# Altium PCB SDI-FIBER.PcbDoc (part 1 of 2)
Units mm, origin at the board's own origin, x right, y up, seen from the top; angles counter-clockwise.
Board outline 80.01 x 32 mm, 4 copper layers (Top Layer, Layer 1, Layer 2, Bottom Layer), stack 1.065 mm thick; 109 components, 63 nets, 333 pads, 163 vias.
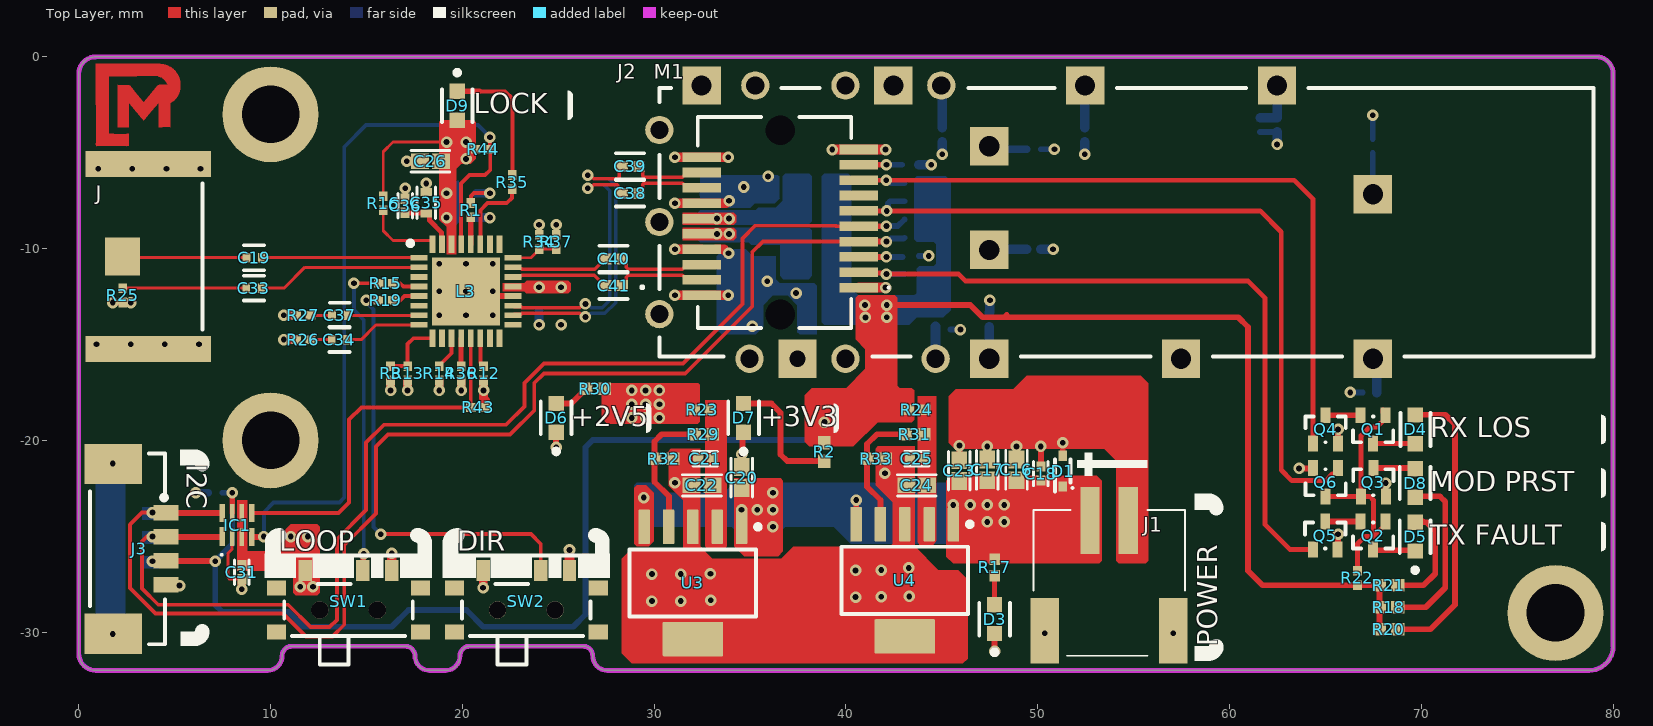
[diagram p0: Top Layer view]
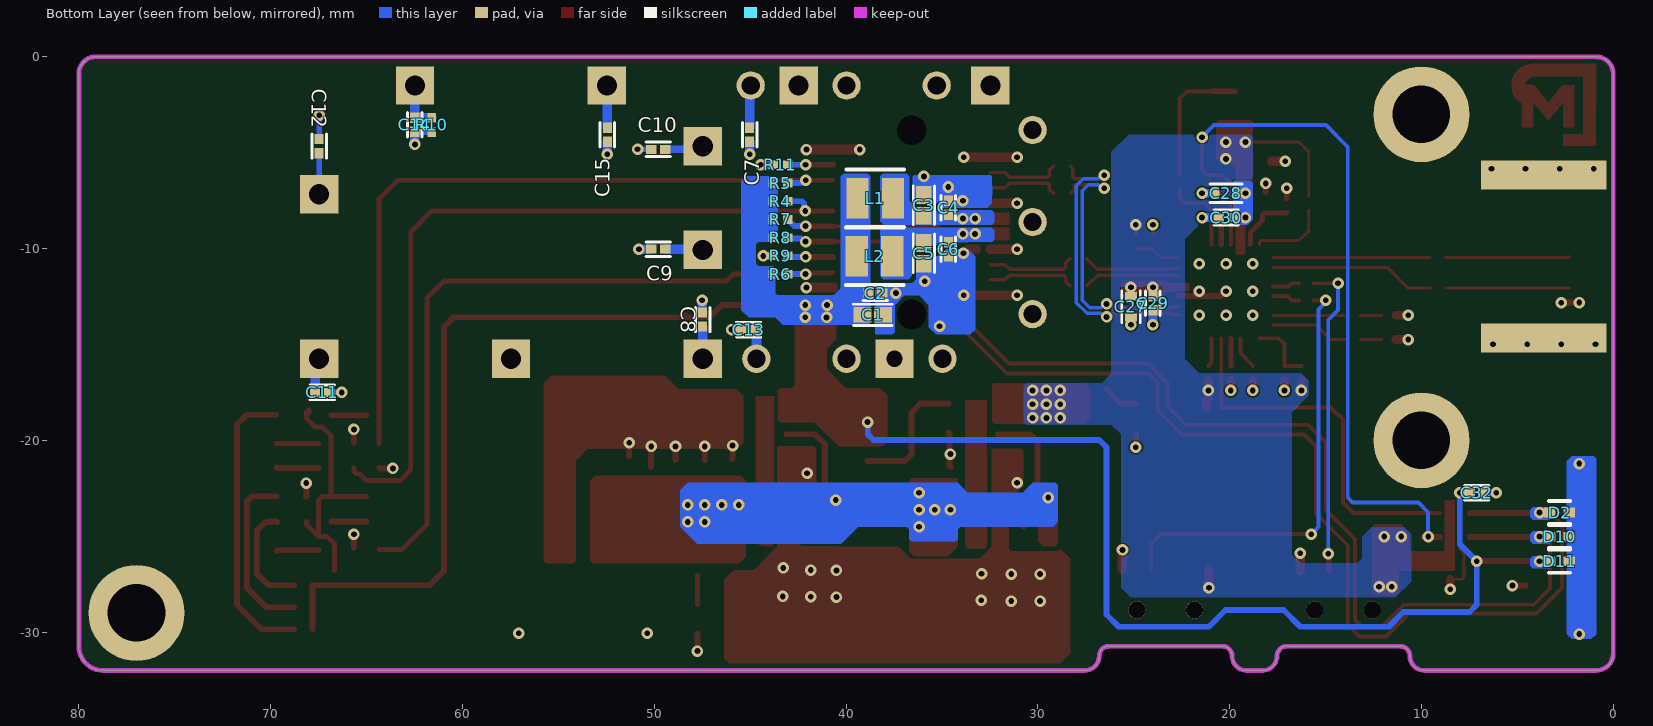
[diagram p1: Bottom Layer view, seen from below]
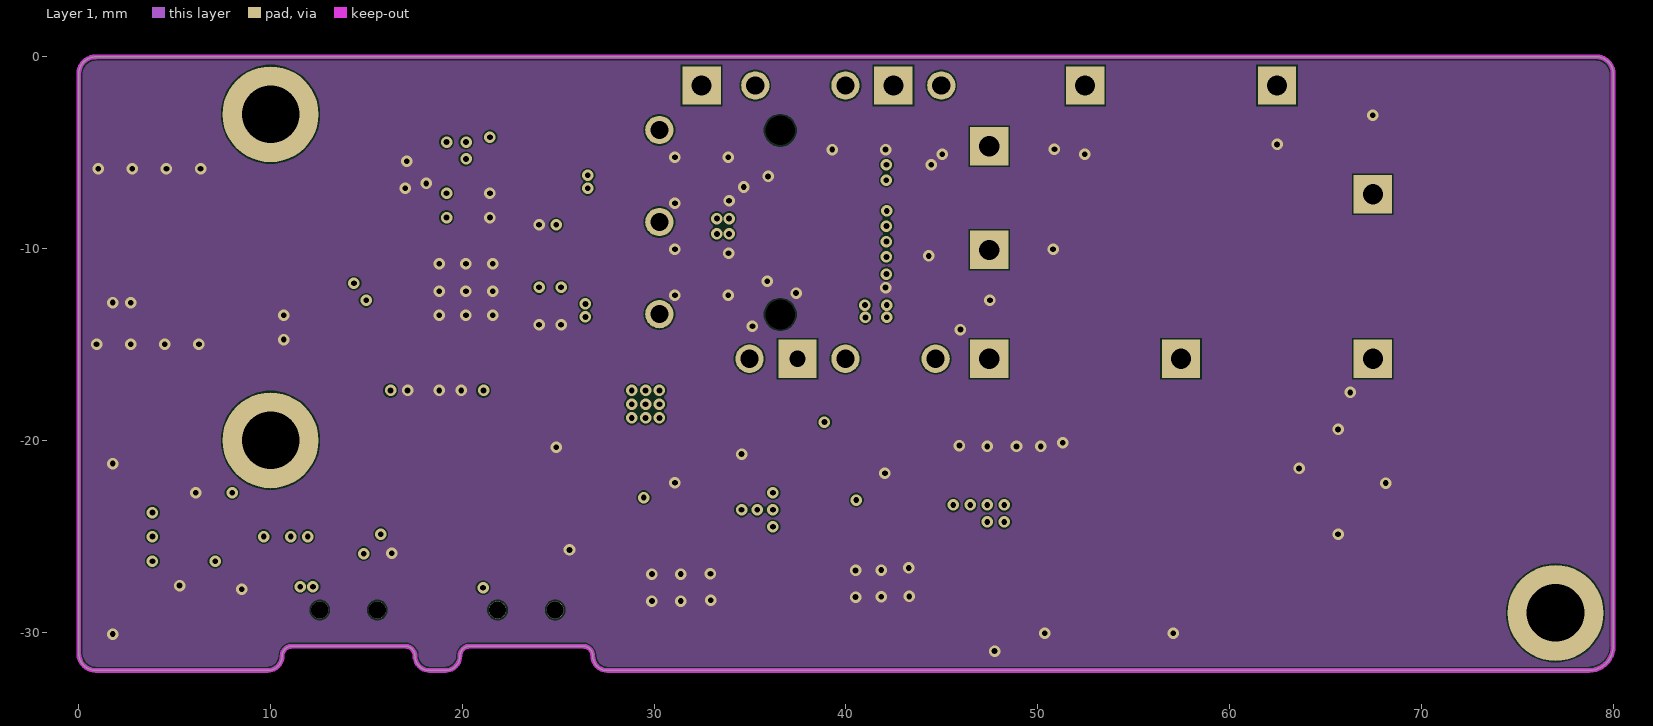
[diagram p2: Layer 1]
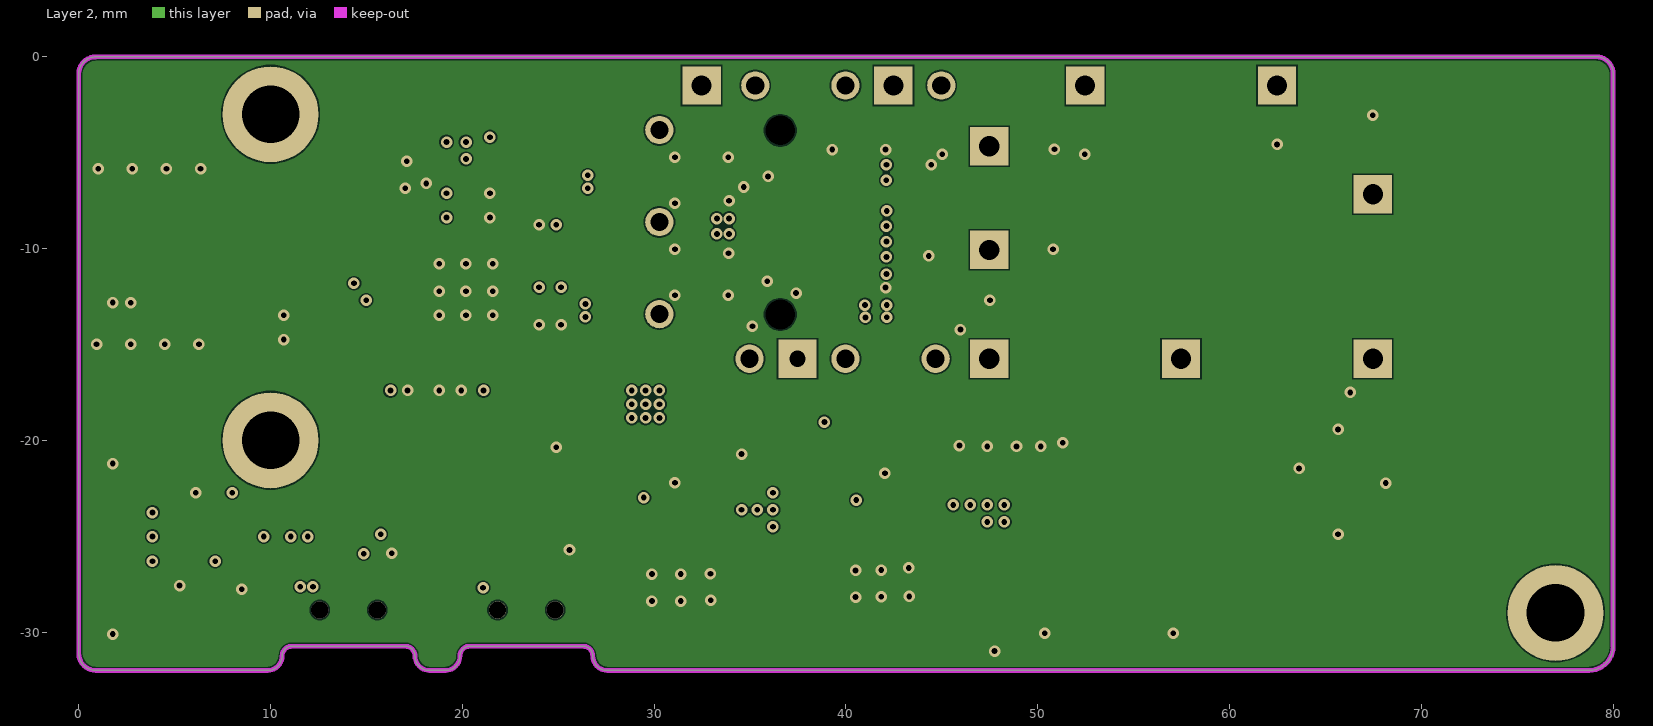
[diagram p3: Layer 2]
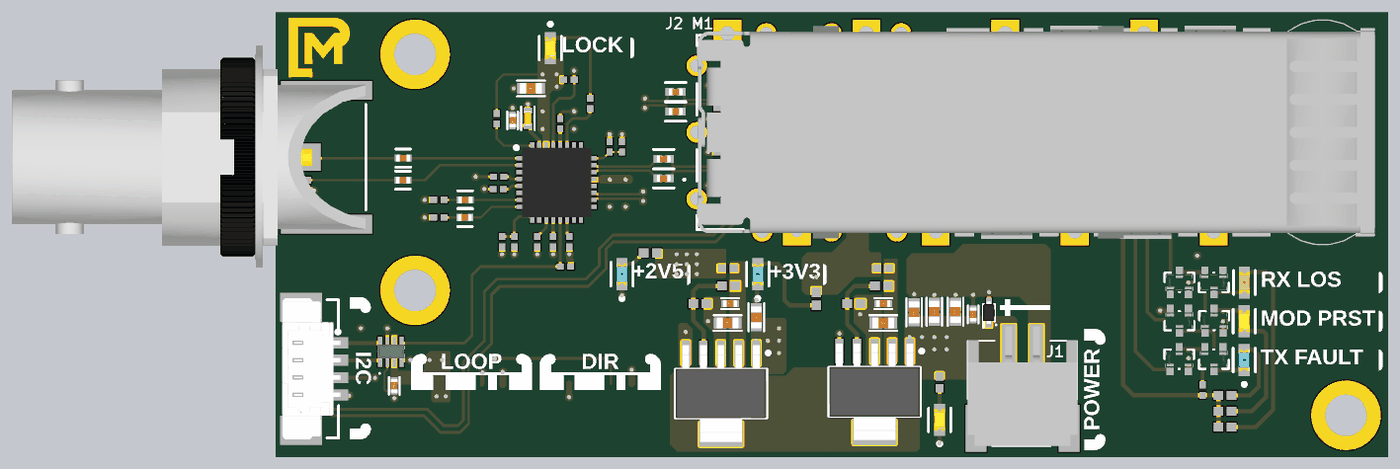
[diagram p5: 3D render of the assembled board from above, using the file's embedded part models]
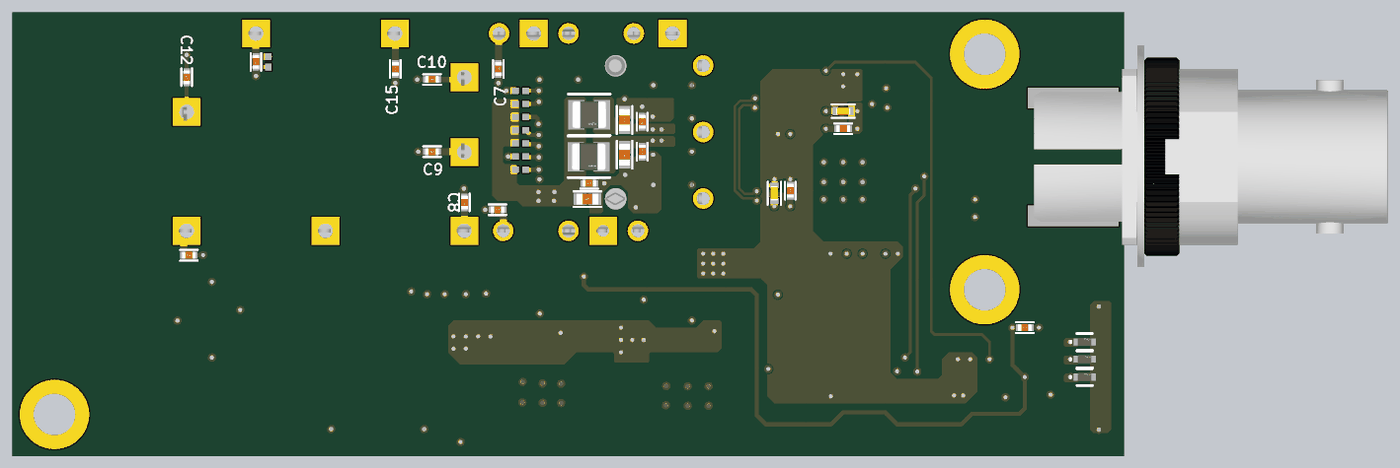
[diagram p6: 3D render of the assembled board from below, using the file's embedded part models]

## Layer stack, top to bottom
Top Solder: solder mask 0.0102, Solder Resist, Dk 3.5
Top Layer: signal copper 0.0381
Dielectric 2: prepreg 0.2213, PP-016, Dk 4.4
Layer 1: signal copper 0.018
Dielectric 1: core 0.51, FR-4, Dk 4.3
Layer 2: signal copper 0.018
Dielectric 3: prepreg 0.2213, PP-016, Dk 4.4
Bottom Layer: signal copper 0.0381
Bottom Solder: solder mask 0.0102, Solder Resist, Dk 3.5

## Board outline
0.885,-32 9.845,-32 ccw(c9.845,-31.242) 10.603,-31.242 cw(c11.111,-31.242) 11.111,-30.734 17.023,-30.734 cw(c17.023,-31.242) 17.531,-31.242 ccw(c18.289,-31.242) 18.289,-32 19.116,-32 ccw(c19.116,-31.242) 19.874,-31.242 cw(c20.382,-31.242) 20.382,-30.734 26.294,-30.734 cw(c26.294,-31.242) 26.802,-31.242 ccw(c27.56,-31.242) 27.56,-32 78.74,-32 ccw(c78.74,-30.73) 80.01,-30.73 80,-30.73 80,-0.879 80.006,-0.885 ccw(c79.121,-0.885) 79.121,0 0.885,0 0.885,-0.004 ccw(c0.885,-0.889) 0,-0.889 0,-31.115 ccw(c0.885,-31.115)

## Design rules (kind name [scope] priority, off if disabled: settings)
Clearance [All] p1: gap=0.076 ignorepadtopadclearanceinfootprint=FALSE
DiffPairsRouting DiffPairsRouting_D100 [InDifferentialPairClass('All Differential Pairs')] p1: maxlimit=0.127 minlimit=0.127 mostfreqgap=0.127 toplayer_minwidth=0.179 toplayer_maxwidth=0.179 toplayer_prefwidth=0.179 midlayer1_minwidth=0.109 midlayer1_maxwidth=0.109 midlayer1_prefwidth=0.109 midlayer2_minwidth=0.109 midlayer2_maxwidth=0.109 midlayer2_prefwidth=0.109 bottomlayer_minwidth=0.179 bottomlayer_maxwidth=0.179 bottomlayer_prefwidth=0.179 impedanceprofiledriven=TRUE impedanceprofileid={388C3103-7E53-444B-A8C6-E052E044349C} impedanceprofilevalue=100.000000 maxuncoupledlength=12.7
DiffPairsRouting [All] p2: maxlimit=0.254 minlimit=0.254 mostfreqgap=0.254 toplayer_minwidth=0.381 toplayer_maxwidth=0.381 toplayer_prefwidth=0.381 midlayer1_minwidth=0.381 midlayer1_maxwidth=0.381 midlayer1_prefwidth=0.381 midlayer2_minwidth=0.381 midlayer2_maxwidth=0.381 midlayer2_prefwidth=0.381 bottomlayer_minwidth=0.381 bottomlayer_maxwidth=0.381 bottomlayer_prefwidth=0.381 maxuncoupledlength=12.7
PolygonConnect PolygonConnect_1 [All] p1: thpad.connectstyle=Relief thpad.reliefconductorwidth=0.254 thpad.reliefentries=4 thpad.polygonreliefangle="90 Angle" thpad.airgapwidth=0.254 smdpad.connectstyle=Relief smdpad.reliefconductorwidth=0.254 smdpad.reliefentries=4 smdpad.polygonreliefangle="90 Angle" smdpad.airgapwidth=0.254 via.connectstyle=Direct via.reliefconductorwidth=0.254 via.reliefentries=4 via.polygonreliefangle="90 Angle" via.airgapwidth=0.254
PolygonConnect [All] p2: connectstyle=Relief reliefconductorwidth=0.254 reliefentries=4 polygonreliefangle="90 Angle" airgapwidth=0.254
RoutingVias [All] p1: holewidth=0.3 width=0.6 viastyle="Through Hole" minholewidth=0.3 minwidth=0.6 maxholewidth=0.3 maxwidth=0.6
SolderMaskExpansion [All] p1: expansion=0.102 istentingtop=FALSE
Width Width_S75 [InNetClass('SDI')] p1: maxlimit=0.158 minlimit=0.088 preferedwidth=0.158 toplayer_minwidth=0.158 midlayer1_maxwidth=0.088 midlayer1_prefwidth=0.088 midlayer2_maxwidth=0.088 midlayer2_prefwidth=0.088 bottomlayer_minwidth=0.158 impedanceprofiledriven=TRUE impedanceprofileid={C24C20FA-2D83-479B-8921-C459C8E3DF6F} impedanceprofilevalue=75.000000 minimp=50.000000 maximp=50.000000 favimp=50.000000
Width [All] p2: maxlimit=0.508 minlimit=0.127 preferedwidth=0.254
29 further rules are at their usual default settings.

## Classes and differential pairs
net class D100: IN0_C_N IN0_C_P OUT0_C_N OUT0_C_P RD_N RD_P TD_N TD_P
net class SDI: SDI0_IO_C_N SDI0_IO_C_P SDI0_IO_N SDI0_IO_P SDI0_OUT+ SDI0_OUT- SDI0_OUT_C+ SDI0_OUT_C-
component class POWER: C16 C17 C18 C20 C21 C22 C23 C24 C25 D1 D3 D6 D7 J1 R2 R17 R23 R24 R29 R30 R31 R32 R33 U3 U4
component class OPTIC: C1 C2 C3 C4 C5 C6 C7 C8 C9 C10 C11 C12 C13 C14 C15 D4 D5 D8 J2 L1 L2 M1 Q1 Q2 Q3 Q4 Q5 Q6 R4 R5 R6 R7 R8 R9 R10 R11 R18 R20 R21 R22
component class CONVERTER: C19 C26 C27 C28 C29 C30 C31 C32 C33 C34 C35 C36 C37 C38 C39 C40 C41 D2 D9 D10 D11 IC1 J J3 L3 R1 R3 R12 R13 R14 R15 R16 R19 R25 R26 R27 R34 R35 R36 R37 R43 R44 SW1 SW2
differential pair OUT0_C: +OUT0_C_P -OUT0_C_N
differential pair RD: +RD_P -RD_N
differential pair IN0_C: +IN0_C_P -IN0_C_N
differential pair TD: +TD_P -TD_N

## Components (designator, comment, footprint, x,y, rotation, side; value= is the part's Value field where it differs from the comment)
C1 "C1608JB0J106K080AB" FP-C1608-080-0_1-IPC_C 38.608,-13.462 r180 bottom value=10u
C2 "C1005X7R1H104K050BB" FP-C1005-050-0_05-IPC_C 38.481,-12.319 r180 bottom value=100n
C3 "C1608JB0J106K080AB" FP-C1608-080-0_1-IPC_C 35.941,-7.747 r90 bottom value=10u
C4 "C1005X7R1H104K050BB" FP-C1005-050-0_05-IPC_C 34.671,-7.874 r90 bottom value=100n
C5 "C1608JB0J106K080AB" FP-C1608-080-0_1-IPC_C 35.941,-10.251 r270 bottom value=10u
C6 "C1005X7R1H104K050BB" FP-C1005-050-0_05-IPC_C 34.671,-10.033 r270 bottom value=100n
C7 "C1005X7R1H104K050BB" FP-C1005-050-0_05-IPC_C 45.027,-4.064 r270 bottom value=100n
C8 "C1005X7R1H104K050BB" FP-C1005-050-0_05-IPC_C 47.476,-13.702 r90 bottom value=100n
C9 "C1005X7R1H104K050BB" FP-C1005-050-0_05-IPC_C 49.798,-10.033 r0 bottom value=100n
C10 "C1005X7R1H104K050BB" FP-C1005-050-0_05-IPC_C 49.798,-4.826 r0 bottom value=100n
C11 "C1005X7R1H104K050BB" FP-C1005-050-0_05-IPC_C 67.322,-17.504 r180 bottom value=100n
C12 "C1005X7R1H104K050BB" FP-C1005-050-0_05-IPC_C 67.476,-4.656 r90 bottom value=100n
C13 "C1005X7R1H104K050BB" FP-C1005-050-0_05-IPC_C 45.085,-14.224 r0 bottom value=100n
C14 "C1005X7R1H104K050BB" FP-C1005-050-0_05-IPC_C 62.492,-3.55 r270 bottom value=100n
C15 "C1005X7R1H104K050BB" FP-C1005-050-0_05-IPC_C 52.451,-4.064 r270 bottom value=100n
C16 "C1608JB0J106K080AB" FP-C1608-080-0_1-IPC_C 48.895,-21.543 r90 top value=10u
C17 "C1608JB0J106K080AB" FP-C1608-080-0_1-IPC_C 47.371,-21.543 r90 top value=10u
C18 "C1005X7R1H104K050BB" FP-C1005-050-0_05-IPC_C 50.165,-21.731 r90 top value=100n
C19 "GRM155R60J475ME47D" FP-GRM155-0_1-MFG 9.144,-10.479 r0 top value=4u7
C20 "C1608JB0J106K080AB" FP-C1608-080-0_1-IPC_C 34.561,-21.938 r90 top value=10u
C21 "C1005X7R1H104K050BB" FP-C1005-050-0_05-IPC_C 32.67,-20.955 r180 top value=100n
C22 "C1608JB0J106K080AB" FP-C1608-080-0_1-IPC_C 32.496,-22.352 r180 top value=10u
C23 "C1608JB0J106K080AB" FP-C1608-080-0_1-IPC_C 45.919,-21.58 r90 top value=10u
C24 "C1608JB0J106K080AB" FP-C1608-080-0_1-IPC_C 43.7,-22.352 r180 top value=10u
C25 "C1005X7R1H104K050BB" FP-C1005-050-0_05-IPC_C 43.705,-20.955 r180 top value=100n
C26 "C1608JB0J106K080AB" FP-C1608-080-0_1-IPC_C 18.338,-5.453 r180 top value=10u
C27 "C1005X5R1A105K050BB" CAPC1005X55X10NL05 25.146,-13.037 r270 bottom value=1µ
C28 "C1005X5R1A105K050BB" CAPC1005X55X10NL05 20.193,-7.112 r0 bottom value=1µ
C29 "C1005X7R1H104K050BB" FP-C1005-050-0_05-IPC_C 24.003,-12.854 r270 bottom value=100n
C30 "C1005X7R1H104K050BB" FP-C1005-050-0_05-IPC_C 20.189,-8.382 r0 bottom value=100n
C31 "C1005X7R1H104K050BB" FP-C1005-050-0_05-IPC_C 8.501,-26.876 r270 top value=100n
C32 "C1005X7R1H104K050BB" FP-C1005-050-0_05-IPC_C 7.112,-22.733 r180 bottom value=100n
C33 "GRM155R60J475ME47D" FP-GRM155-0_1-MFG 9.125,-12.065 r0 top value=4u7
C34 "GRM155R60J475ME47D" FP-GRM155-0_1-MFG 13.589,-14.749 r0 top value=4u7
C35 "C1005X5R1A105K050BB" CAPC1005X55X10NL05 18.117,-7.612 r90 top value=1µ
C36 "C1005X7R1H104K050BB" FP-C1005-050-0_05-IPC_C 17.018,-7.761 r90 top value=100n
C37 "GRM155R60J475ME47D" FP-GRM155-0_1-MFG 13.608,-13.479 r0 top value=4u7
C38 "GRM155R60J475ME47D" FP-GRM155-0_1-IPC_B 28.75,-7.124 r180 top value=4u7
C39 "GRM155R60J475ME47D" FP-GRM155-0_1-IPC_B 28.75,-5.715 r180 top value=4u7
C40 "GRM155R60J475ME47D" FP-GRM155-0_1-IPC_B 27.892,-10.541 r180 top value=4u7
C41 "GRM155R60J475ME47D" FP-GRM155-0_1-IPC_B 27.892,-11.938 r180 top value=4u7
D1 "PESD5Z5.0F" SODFL1608X65N 51.308,-21.606 r90 top
D2 "TPD1E05U06DPYT" FP-DPY0002A-MFG 2.802,-23.764 r0 bottom
D3 "LTST-C191GKT" FP-LTST-C191GKT-MFG 47.752,-29.325 r90 top
D4 "LTST-C191KRKT" FP-LTST-C191KRKT-MFG 69.693,-19.431 r90 top
D5 "LTST-C191TBKT" FP-LTST-C191TBKT-MFG 69.678,-25.019 r90 top
D6 "LTST-C191TBKT" FP-LTST-C191TBKT-MFG 24.892,-18.83 r90 top
D7 "LTST-C191TBKT" FP-LTST-C191TBKT-MFG 34.664,-18.83 r90 top
D8 "LTST-C191GKT" FP-LTST-C191GKT-MFG 69.678,-22.225 r270 top
D9 "LTST-C191GKT" FP-LTST-C191GKT-MFG 19.734,-2.552 r270 top
D10 "TPD1E05U06DPYT" FP-DPY0002A-MFG 2.802,-25.019 r0 bottom
D11 "TPD1E05U06DPYT" FP-DPY0002A-MFG 2.802,-26.304 r0 bottom
IC1 "NTS0102GT" NTS0102GT 8.251,-24.419 r0 top
J "BNC7T-J-P-XX-ST-EM1D" SAMTEC_BNC7T-J-P-XX-ST-EM1D 0.101,-10.414 r270 top
J1 "S2B-PH-SM4-TB_LF__SN_" S2BPHSM4TBLFSN 53.721,-27.432 r180 top
J2 "2007215-1" 2007215-1 36.576,-8.636 r180 top locked
J3 "533980471" FP-533980471-MFG 2.54,-25.654 r90 top
L1 "DFE252012P-4R7M=P2" FP-DFE252012C-IPC_C 38.481,-7.372 r180 bottom
L2 "DFE252012P-4R7M=P2" FP-DFE252012C-IPC_C 38.518,-10.4 r180 bottom
L3 "LMH0397RTVR" QFN50P500X500X80-33N-D 20.189,-12.229 r0 top
M1 "1888247-1" 1888247-1 36.576,-8.636 r0 top locked
Q1 "RU1J002YNTCL" FP-UMT3F-MFG 67.492,-19.426 r270 top
Q2 "RU1J002YNTCL" FP-UMT3F-MFG 67.492,-24.964 r270 top
Q3 "RU1J002YNTCL" FP-UMT3F-MFG 67.507,-22.187 r90 top
Q4 "RU1J002YNTCL" FP-UMT3F-MFG 65.009,-19.426 r90 top
Q5 "RU1J002YNTCL" FP-UMT3F-MFG 64.994,-24.964 r90 top
Q6 "RU1J002YNTCL" FP-UMT3F-MFG 65.009,-22.187 r270 top
R1 "RC0402FR-071KL" RESC1005X40X25LL05T10 20.439,-8.001 r90 top value=1K
R2 "RC0402FR-071K2L" RESC1005X40X25ML05T10 38.878,-20.607 r270 top value=1K2
R3 "RC0402FR-071KL" RESC1005X40X25LL05T10 16.256,-16.504 r90 top value=1K
R4 "RC0402FR-0710KL" RESC1005X40X25LL05T10 43.425,-7.535 r180 bottom value=10K
R5 "RC0402FR-0710KL" RESC1005X40X25LL05T10 43.425,-6.586 r180 bottom value=10K
R6 "RC0402FR-0710KL" RESC1005X40X25LL05T10 43.425,-11.333 r180 bottom value=10K
R7 "RC0402FR-0710KL" RESC1005X40X25LL05T10 43.425,-8.485 r180 bottom value=10K
R8 "RC0402FR-0710KL" RESC1005X40X25LL05T10 43.425,-9.434 r180 bottom value=10K
R9 "RC0402FR-070RL" RESC1005X40X25LL05T10 43.425,-10.384 r0 bottom value=0R
R10 "RC0402FR-07330RL" RESC1005X40X25LL05T10 61.595,-3.556 r270 bottom value=330R
R11 "RC0402FR-070RL" RESC1005X40X25LL05T10 43.425,-5.636 r0 bottom value=0R
R12 "RC0402FR-071KL" RESC1005X40X25LL05T10 21.106,-16.504 r90 top value=1K
R13 "RC0402FR-071KL" RESC1005X40X25LL05T10 17.145,-16.504 r270 top value=1K
R14 "RC0402FR-071KL" RESC1005X40X25LL05T10 18.796,-16.504 r270 top value=1K
R15 "RC0402FR-071KL" RESC1005X40X25LL05T10 16.008,-11.811 r180 top value=1K
R16 "RC0402FR-071KL" RESC1005X40X25LL05T10 15.875,-7.638 r270 top value=1K
R17 "RC0402FR-072K2L" RESC1005X40X25NL05T10 47.752,-26.626 r270 top value=2K2
R18 "RC0402FR-071K2L" RESC1005X40X25ML05T10 68.293,-28.702 r0 top value=1K2
R19 "RC0402FR-071KL" RESC1005X40X25LL05T10 15.996,-12.7 r180 top value=1K
R20 "RC0402FR-071K2L" RESC1005X40X25ML05T10 68.293,-29.845 r0 top value=1K2
R21 "RC0402FR-071K2L" RESC1005X40X25ML05T10 68.293,-27.559 r0 top value=1K2
R22 "RC0402FR-0710KL" RESC1005X40X25LL05T10 66.675,-27.178 r90 top value=10K
R23 "RC0402FR-070RL" RESC1005X40X25NL05T10 32.512,-18.415 r0 top value=0R
R24 "RC0402FR-070RL" RESC1005X40X25NL05T10 43.688,-18.415 r0 top value=0R
R25 "RC0402FR-0775RL" RESC1005X40X25LL05T10 2.286,-12.44 r270 top value=75R
R26 "RC0402FR-0775RL" RESC1005X40X25LL05T10 11.709,-14.749 r180 top value=75R
R27 "RC0402FR-0775RL" RESC1005X40X25LL05T10 11.709,-13.479 r180 top value=75R
R29 "RC0402FR-074K22L" RESC1005X40X25ML05T10 32.562,-19.685 r180 top value=4K22
R30 "RC0402FR-07330RL" RESC1005X40X25ML05T10 26.924,-17.308 r180 top value=330R
R31 "RC0402FR-076K98L" RESC1005X40X25ML05T10 43.578,-19.685 r0 top value=6K98
R32 "RC0402FR-074K02L" RESC1005X40X25ML05T10 30.497,-20.955 r180 top value=4K02
R33 "RC0402FR-074K02L" RESC1005X40X25ML05T10 41.579,-20.955 r180 top value=4K02
R34 "RC0402FR-071KL" RESC1005X40X25LL05T10 24.003,-9.658 r90 top value=1K
R35 "RC0402FR-071KL" RESC1005X40X25LL05T10 22.606,-6.54 r270 top value=1K
R36 "RC0402FR-071KL" RESC1005X40X25LL05T10 19.939,-16.504 r270 top value=1K
R37 "RC0402FR-071KL" RESC1005X40X25LL05T10 24.892,-9.658 r270 top value=1K
R43 "RC0402FR-0710KL" RESC1005X40X25LL05T10 20.828,-18.288 r180 top value=10K
R44 "RC0402FR-0710KL" RESC1005X40X25LL05T10 21.082,-4.826 r0 top value=10K
SW1 "450404015514" 450404015514 -1255.933,-1298.847 r180 top
SW2 "450404015514" 450404015514 -1246.662,-1298.847 r180 top
U3 "TPS73801DCQR" DCQ0006A_L 32.021,-27.436 r270 top
U4 "TPS73801DCQR" DCQ0006A_L 43.07,-27.301 r270 top

## Footprints (in the part's own frame and the unit in brackets; to place one, negate y for a bottom-side part, rotate by r counter-clockwise, add the part's x,y. Pads: shape width x height; smd on the part's side, far side on the other; paste and mask are expansions set on the pad)
1888247-1 [mm]
  rect 2x0.5 smd: 1(4.1,-3.4) 2(4.1,-2.6) 3(4.1,-1.8) 4(4.1,-1) 5(4.1,-0.2) 6(4.1,0.6) 7(4.1,1.4) 8(4.1,2.2) 9(4.1,3) 10(4.1,3.8) 11(-4.1,3.4) 12(-4.1,2.6) 13(-4.1,1.8) 14(-4.1,1) 15(-4.1,0.2) 16(-4.1,-0.6) 17(-4.1,-1.4) 18(-4.1,-2.2) 19(-4.1,-3) 20(-4.1,-3.8)
  round 0.775 hole 1.55 unplated: 21(0,-4.8) 22(0,4.8)
  silkscreen extent -4.3,-5.5 5.7,5.5, body extent -4.47,-5.5 4.53,5.5, height 5.19
2007215-1 [mm]
  rect 2x2 hole 1.05: MH1(-30.9,7.112) MH2(-30.9,-1.468) MH3(-25.9,-7.138) MH4(-15.9,-7.138) MH6(-5.9,-7.138) MH9(4.1,-7.138) MH17(-10.9,7.112) MH18(-20.9,7.112) MH19(-10.9,1.432) MH20(-10.9,-3.968)
  round 1.478 hole 0.95: MH5(-8.4,-7.138) MH7(-3.4,-7.138) MH8(1.3,-7.138) MH10(6.3,-4.818) MH11(6.3,-0.018) MH12(6.3,4.782) MH13(1.6,7.112) MH15(-3.4,7.112) MH16(-8.1,7.112)
  rect 2x2 hole 0.85: MH14(-0.9,7.112)
  silkscreen extent -42.4,-7.01 7.25,6.99, body extent -42.5,-8.17 6.3,8.13, height 10.71
450404015514 [mm] "Right angle Slide Switch"
  rect 0.7x1.1 smd: COM(-1270.75,-1272.05) L1(-1267.75,-1272.05) L2(-1272.25,-1272.05)
  round 0.9 hole 0.9 unplated: M1(-1271.5,-1270) M2(-1268.5,-1270)
  rect 1x0.8 smd: M3(-1273.75,-1268.85) M4(-1266.25,-1268.85) M5(-1273.75,-1271.15) M6(-1266.25,-1271.15)
  silkscreen extent -1273.35,-1271.35 -1266.65,-1267.15, body extent -1273.85,-1272.25 -1266.15,-1267.12, height 1.4
CAPC1005X55X10NL05 [mm] "Chip Capacitor, 2-Leads, Body 1.05x0.55mm, IPC Medium Density"
  rect 0.42x0.62 smd: 1(-0.55,0) 2(0.55,0)
  silkscreen extent -0.83,-0.48 0.83,0.48, body extent -0.53,-0.28 0.53,0.28, height 0.55
DCQ0006A_L [mm] "SOT223, 6-Leads, Body 6.55x3.55mm, Pitch 1.27mm, IPC High Density"
  rrect17% 1.8x0.6 smd: 1(-2.925,2.54) 2(-2.925,1.27) 3(-2.925,0) 4(-2.925,-1.27) 5(-2.925,-2.54)
  rrect6% 1.8x3.15 smd: 6(2.925,0)
  silkscreen extent -3.05,-3.3 1.75,3.52, body extent -3.48,-3.25 3.48,3.25, height 1.64
FP-533980471-MFG [mm]
  rect 0.8x1.3 smd paste+0 mask+0: 1(1.875,-2) 2(0.625,-2) 3(-0.625,-2) 4(-1.875,-2)
  rect 2.1x3 smd paste+0 mask+0: 5(-4.425,0.75) 6(4.425,0.75)
  silkscreen extent -4.97,-2.03 4.97,1.95, body extent -5.58,-2.75 5.58,2.35, height 0.25
FP-C1005-050-0_05-IPC_C [mm]
  rect 0.539x0.472 smd paste+0 mask+0: 1(-0.367,0) 2(0.367,0)
  silkscreen extent -0.64,-0.38 0.64,0.38, body extent -0.5,-0.25 0.5,0.25, height 0.55
FP-C1608-080-0_1-IPC_C [mm]
  rect 0.931x0.812 smd paste+0 mask+0: 1(-0.541,0) 2(0.541,0)
  silkscreen extent -1.01,-0.56 1.01,0.56, body extent -0.8,-0.4 0.8,0.4, height 0.9
FP-DFE252012C-IPC_C [mm]
  rect 1.155x2.106 smd paste+0 mask+0: 1(-0.926,0) 2(0.926,0)
  silkscreen extent -1.5,-1.5 1.5,1.5, body extent -1.25,-1 1.25,1, height 1.2
FP-DPY0002A-MFG [mm]
  rect 0.6x0.5 smd paste+0 mask+0: 1(-0.5,0) 2(0.5,0)
  silkscreen extent -0.56,-0.6 0.55,0.6, body extent -0.5,-0.3 0.5,0.3, height 0.45
FP-GRM155-0_1-IPC_B [mm]
  rect 0.615x0.572 smd paste+0 mask+0: 1(-0.429,0) 2(0.429,0)
  silkscreen extent -0.74,-0.69 0.74,0.69, body extent -0.89,-0.44 0.89,0.44, height 0.25
FP-GRM155-0_1-MFG [mm]
  rect 0.4x0.5 smd paste+0 mask+0: 1(-0.4,0) 2(0.4,0)
  silkscreen extent -0.53,-0.65 0.53,0.65, body extent -0.7,-0.38 0.7,0.38, height 0.25
FP-LTST-C191GKT-MFG [mm]
  rect 0.8x0.8 smd paste+0 mask+0: 1(-0.75,0) 2(0.75,0)
  silkscreen extent -1.85,-0.8 0.85,0.8, body extent -1.25,-0.55 1.25,0.55, height 0.25
FP-LTST-C191KRKT-MFG [mm]
  rect 0.8x0.8 smd paste+0 mask+0: 1(-0.75,0) 2(0.75,0)
  silkscreen extent -0.86,-0.78 0.86,0.78, body extent -0.8,-0.4 0.8,0.4, height 0.65
FP-LTST-C191TBKT-MFG [mm]
  rect 0.8x0.8 smd paste+0 mask+0: 1(-0.75,0) 2(0.75,0)
  silkscreen extent -1.87,-0.8 0.85,0.8, body extent -0.8,-0.4 0.8,0.4, height 0.65
FP-UMT3F-MFG [mm]
  rect 0.83x0.52 smd paste+0 mask+0: 1(-0.735,0.65) 2(-0.735,-0.65) 3(0.735,0)
  silkscreen extent -0.67,-1.05 0.67,1.05, body extent -1.05,-1 1.05,1, height 1.06
NTS0102GT [mm]
  rect 0.3x1 smd: 1(-0.775,-0.6)
  rect 0.25x0.95 smd: 2(-0.25,-0.625) 3(0.25,-0.625) 6(0.25,0.625) 7(-0.25,0.625)
  rect 0.3x0.95 smd: 4(0.775,-0.625) 5(0.775,0.625) 8(-0.775,0.625)
  silkscreen extent -0.85,-1.6 -0.75,-1.5, body extent -0.97,-0.5 0.97,0.5, height 0.47
QFN50P500X500X80-33N-D [mm]
  rect 0.9x0.3 smd: 1(-2.45,1.75) 2(-2.45,1.25) 3(-2.45,0.75) 4(-2.45,0.25) 5(-2.45,-0.25) 6(-2.45,-0.75) 7(-2.45,-1.25) 8(-2.45,-1.75) 17(2.45,-1.75) 18(2.45,-1.25) 19(2.45,-0.75) 20(2.45,-0.25) 21(2.45,0.25) 22(2.45,0.75) 23(2.45,1.25) 24(2.45,1.75)
  rect 0.3x0.9 smd: 9(-1.75,-2.45) 10(-1.25,-2.45) 11(-0.75,-2.45) 12(-0.25,-2.45) 13(0.25,-2.45) 14(0.75,-2.45) 15(1.25,-2.45) 16(1.75,-2.45) 25(1.75,2.45) 26(1.25,2.45) 27(0.75,2.45) 28(0.25,2.45) 29(-0.25,2.45) 30(-0.75,2.45) 31(-1.25,2.45) 32(-1.75,2.45)
  rect 3.55x3.55 smd: 33(0,0)
  silkscreen extent -3.02,2.38 -2.77,2.62, body extent -2.5,-2.5 2.5,2.5, height 0.8
RESC1005X40X25LL05T10 [mm] "Chip Resistor, 2-Leads, Body 1.00x0.50mm, IPC High Density"
  rect 0.5x0.45 smd: 1(-0.375,0) 2(0.375,0)
  body extent -0.53,-0.27 0.53,0.28, height 0.4
RESC1005X40X25ML05T10 [mm] "Chip Resistor, 2-Leads, Body 1.00x0.50mm, IPC Low Density"
  rect 0.7x0.65 smd: 1(-0.475,0) 2(0.475,0)
  body extent -0.53,-0.27 0.53,0.28, height 0.4
RESC1005X40X25NL05T10 [mm] "Chip Resistor, 2-Leads, Body 1.00x0.50mm, IPC Medium Density"
  rect 0.6x0.55 smd: 1(-0.425,0) 2(0.425,0)
  body extent -0.53,-0.27 0.53,0.28, height 0.4
S2BPHSM4TBLFSN [mm]
  rect 1x3.5 smd: 1(1,-3.25) 2(-1,-3.25)
  rect 1.5x3.4 smd: MP1(3.35,2.5) MP2(-3.35,2.5)
  silkscreen extent -3.95,-5 3.95,3.8, body extent -3.95,-4.83 3.95,3.77, height 5.6
SAMTEC_BNC7T-J-P-XX-ST-EM1D [mm]
  rect 1.98x1.83 smd: 1(0,2.185)
  rect 1.35x6.55 smd: S1(-4.825,3.525) S2(4.825,3.525)
  rect 1.5x6.55 smd far side: S3(-4.25,3.525) S4(4.25,3.525)
  silkscreen extent -3.8,6.35 3.8,6.35, body extent -7.99,-19.13 7.99,6.35, height 8.63
SODFL1608X65N [mm]
  rect 0.53x0.42 smd: 1(-0.8,0) 2(0.8,0)
  silkscreen extent -1.06,-0.4 0.6,0.4, body extent -0.8,-0.42 0.8,0.41, height 0.61

## Part data
C1 C3 C5 C16 C17 C20 C22 C23 C24 C26: "MLCC 10μF ±10% 6.3V JB SMD 0603", Case Code (Imperial)=0603, Case Code (Metric)=1608, Dielectric Material=Ceramic, Max Operating Temperature=85°C, Min Operating Temperature=-25°C, Package Quantity=4000, Tolerance=10%, Voltage Rating=6.3V, Case/Package=0603, Height=0.8mm, Lead Free="Lead Free", Length=0.063inch, Mount="Surface Mount", Packaging="Tape and Reel", Resistor Type=Ceramic, RoHS Compliant=Yes, Series=C, Termination=SMD/SMT, Thickness=0.035inch, Voltage Rating (DC)=6.3V, Width=0.8mm
C2 C4 C6 C7 C8 C9 C10 C11 C12 C13 C14 C15 C18 C21 C25 C29 C30 C31 C32 C36: "MLCC 100nF ±10% 50V X7R SMD 0402", Case Code (Imperial)=0402, Case Code (Metric)=1005, Dielectric=X7R, Dielectric Material=Ceramic, Max Operating Temperature=125°C, Min Operating Temperature=-55°C, Package Quantity=1, Tolerance=10%, Voltage=50V, Case/Package=0402, Construction=Flat, Depth=0.5mm, Height=0.5mm, Lead Free="Lead Free", Length=1mm, Mount="Surface Mount", Packaging="Tape and Reel", Part Number=C1005X7R1H104K050BB, Radiation Hardening=No, REACH SVHC="No SVHC", Resistor Type=Ceramic, RoHS Compliant=Yes, Series=C, Termination=SMD/SMT, Thickness=0.022inch, Voltage Rating=50V, Voltage Rating (DC)=50V, Weight=2.3E-05oz, Width=0.02inch
C19 C33 C34 C37 C38 C39 C40 C41: library part CMP-2008-04549-2, "Chip Multilayer Ceramic Capacitors for General Purpose, 0402, 4.7uF, X5R, 15%, 20%, 6.3V", Case Code (Imperial)=0402, Case Code (Metric)=1005, Dielectric=X5R, Max Operating Temperature=85°C, Min Operating Temperature=-55°C, Package Quantity=10000, Tolerance=20%, Voltage=6.3V, Case/Package=0402, Contact Plating=Tin, Depth=0.5mm, Height=0.5mm, Lead Free="Lead Free", Length=1mm, Mount="Surface Mount", Packaging="Tape and Reel", REACH SVHC="No SVHC", Termination=SMD/SMT, Thickness=0.022inch, Voltage Rating=6.3V, Voltage Rating (DC)=6.3V, Weight=0.000212oz, Width=0.02inch
C27 C28 C35: "MLCC 1 uF, +/- 10%, 10 V, -55 to 85 degC, 0402 (1005 Metric), RoHS, Tape and Reel", Manufacturer=TDK, Operating Temperature=-55°C~85°C, Package / Case=0402(1005Metric), Package Description="2-Pin Surface Mount Device, Body 1 x 0.5 mm", Package Reference=1005, PCN Part Number=MLCCPartNumberChange30/Nov/2012, Ratings=-, Standard Package=1, Temperature Coefficient=X5R, Tolerance=±10%, Voltage - Rated=10V, Applications=GeneralPurpose, Category=Capacitors, Datasheet URL=http://download.siliconexpert.com/pdfs/2015/4/21/15/54/45/779/tdk_/manual/37024850441143360mlcc_commercial_general_en.pdf, Datasheet Version=03/2015, Family=CeramicCapacitors, Features=-, Height - Seated (Max)=-, Lead Spacing=-, Lead Style=-, Manufacturer URL=http://www.tdk.com/, Mounting Technology=SurfaceMount, Mounting Type=SurfaceMount,MLCC, Online Catalog=CSeries,GeneralPurpose, Other Names=445-4114-6, Packaging=Digi-Reel®, Part Number=C1005X5R1A105K050BB, Product Training Modules=CSeriesGeneralApplicationsSEAT,CCV,andTVCLDesignToolsGuidetoReplacinganElectrolyticCapacitorwithanMLCC, RoHS Information=RoHSCertificate-MLCC, Series=C, Size / Dimension="0.039\"Lx0.020\"W(1.00mmx0.50mm)", Thickness (Max)="0.022\"(0.55mm)"
D1: "Diode ESD (Uni-directional)", Manufacturer_Name=Nexperia, Mouser Part Number=771-PESD5Z5.0F, Arrow Part Number=PESD5Z5.0F, Arrow Price/Stock=https://www.arrow.com/en/products/pesd5z5.0f/nexperia?utm_currency=USD&region=nac, Datasheet Link=https://assets.nexperia.com/documents/data-sheet/PESD5Z5_0.pdf, Height=0.65mm, Manufacturer_Part_Number=PESD5Z5.0F, Mouser Price/Stock=https://www.mouser.co.uk/ProductDetail/Nexperia/PESD5Z5.0F?qs=HNBw3F7vE2wb3Eh3cMl6Jg%3D%3D
D2 D10 D11: library part CMP-04985-000007-1, "TVS DIODE 5.5V 14V 2X1SON", Breakdown Voltage=6.5V, Capacitance=0.42pF, Case/Package=0402, Clamping Voltage=14V, Leakage Current=10nA, Max Operating Temperature=125°C, Max Power Dissipation=40W, Min Breakdown Voltage=6V, Min Operating Temperature=-40°C, Operating Supply Voltage=5.5V, Package Quantity=250, Peak Pulse Current=2.5A, Power Line Protection=Yes, Test Current=1mA, Direction=Unidirectional, Element Configuration=Single, ESD Protection=Yes, Height=0.4mm, Interface=LVDS, Lead Free="Lead Free", Length=1.1mm, Max Reverse Leakage Current=10nA, Mount="Surface Mount", Number of Bidirectional Channels=1, Number Of Channels=1, Number of Pins=2, Packaging="Tape and Reel", Peak Pulse Power=40W, Polarity=Bidirectional, Radiation Hardening=No, REACH SVHC="No SVHC", Reverse Standoff Voltage=5.5V, Termination=SMD/SMT, Width=0.7mm, Working Voltage=5.5V
D3 D8 D9: library part CMP-22017-000029-1, "LED GREEN CLEAR CHIP SMD", Case Code (Imperial)=0603, Case Code (Metric)=1608, Color=Green, Forward Current=30mA, Forward Voltage=2.1V, Lens Color=Colorless, Max Operating Temperature=85°C, Min Operating Temperature=-55°C, Package Quantity=1, Power Dissipation=100mW, Reverse Voltage=5V, Test Current=20mA, Case/Package=0603, Depth=0.8mm, Dominant Wavelength=569nm, Height=0.55mm, Illumination Color=Green, Lead Free="Lead Free", Length=1.6mm, Lens Style=Clear, Lens Transparency=Clear, Luminous Intensity=12mcd, Mount="Surface Mount", Number of Elements=1, Number of LEDs=1, Number of Pins=2, Packaging="Tape and Reel", Power Rating=100mW, Radiation Hardening=No, Viewing Angle=130°, Wavelength=565nm, Width=0.8mm
D4: library part CMP-2000-05199-2, Case Code (Imperial)=0603, Case Code (Metric)=1608, Color=Red, Current=2A, Forward Current=20mA, Forward Voltage=2V, Lens Color=Colorless, Max Operating Temperature=85°C, Min Operating Temperature=-55°C, Power Dissipation=75mW, Reverse Voltage=5V, Case/Package=0603, Depth=800µm, Dominant Wavelength=631nm, Height=550µm, Illumination Color=Red, Lead Free="Lead Free", Length=1.6mm, Lens Style=Clear, Lens Transparency=Clear, Luminous Intensity=54mcd, Mount="Surface Mount", NexarPartId=549908, Number of Elements=1, Number of LEDs=1, Number of Pins=2, Packaging="Tape and Reel", Power Rating=75mW, Radiation Hardening=No, RoHS=Compliant, Schedule B="8541402000, 8541402000", Test Current=20mA, Viewing Angle=130°, Voltage=2V, Wavelength=639nm, Width=800µm
D5 D6 D7: library part CMP-22017-000008-1, "LED BLUE CLEAR CHIP SMD", Case Code (Imperial)=0603, Case Code (Metric)=1608, Color=Blue, Forward Current=20mA, Forward Voltage=3.8V, Lens Color=Colorless, Max Operating Temperature=80°C, Max Power Dissipation=75mW, Min Operating Temperature=-20°C, Package Quantity=1, Power Dissipation=76mW, Reverse Voltage=5V, Case/Package=0603, Depth=1.6mm, Dominant Wavelength=475nm, Height=0.55mm, Illumination Color=Blue, Lead Free="Lead Free", Length=0.8mm, Lens Style=Diffused, Lens Transparency=Clear, Luminous Intensity=180mcd, Mount="Surface Mount", Number of Elements=1, Number of LEDs=1, Number of Pins=2, Packaging="Tape and Reel", Radiation Hardening=No, Test Current=20mA, Viewing Angle=130°, Wavelength=468nm, Width=0.8mm
IC1: "Integrated Circuit", Manufacturer_Name=NXP, Mouser Part Number=N/A, Datasheet Link=https://www.nxp.com/docs/en/data-sheet/NTS0102.pdf, Height=0.5mm, Manufacturer_Part_Number=NTS0102GT, Mouser Price/Stock=https://www.mouser.co.uk/ProductDetail/NXP-Semiconductors/NTS0102GT?qs=fAHHVMwC%252BbiEwQ74lfEnvg%3D%3D
J: "BNC Connector Jack, Female Socket 75Ohm Board Edge, End Launch; Panel Mount Solder", Package=None, Availability=Unavailable, DigiKey-Purchase-URL=https://snapeda.com/shop?store=DigiKey&id=3266999, MF="Samtec Inc.", MP=BNC7T-J-P-GN-ST-EM1D, Price=None, SnapEDA_Link=https://www.snapeda.com/parts/BNC7T-J-P-GN-ST-EM1D/Samtec%20Inc./view-part/3266999/?ref=snap, Toby_UK-Purchase-URL=https://snapeda.com/shop?store=Toby+UK&id=3266999
J1: "Connector", Arrow Part Number=S2B-PH-SM4-TB(LF)(SN), Manufacturer_Name="JST (JAPAN SOLDERLESS TERMINALS)", Mouser Part Number=N/A, Arrow Price/Stock=https://www.arrow.com/en/products/s2b-ph-sm4-tb-lf-sn/jst-manufacturing?utm_currency=USD&region=europe, Datasheet Link=https://www.jst-mfg.com/product/pdf/eng/ePH.pdf, Height=6.6mm, Manufacturer_Part_Number=S2B-PH-SM4-TB(LF)(SN), Mouser Price/Stock=https://www.mouser.co.uk/ProductDetail/JST-Commercial/S2B-PH-SM4-TBLFSN?qs=QpmGXVUTftEA9IU90i0xlg%3D%3D
J2: "Position SFP+ Cage Connector Press-Fit Through Hole"
J3: library part CMP-04776-000105-1, "CONN HEADER SMD 4POS 1.25MM", Ambient Temperature Range High=+105°C, Ambient Temperature Range Low=-40°C, Current Rating=1A, Manufacturer=Molex, Package=0, Temperature="-40°C to +105°C", Voltage Rating=125V, Automotive=No, Category=Conn, ComponentLink2Description=Datasheet, ComponentLink2URL=https://www.molex.com/pdm_docs/ps/PS-51021-024-001.pdf, Conn Gender=Male, Conn Orientation=Vertical, Contact Material=Tin, Device Class L1=Connectors, Device Class L2="Headers and Wire Housings", Device Class L3=unset, Digikey Description="CONN HEADER SMD 4POS 1.25MM", Footprint Url=https://www.molex.com/pdm_docs/sd/533980471_sd.pdf, Height=5.1mm, Lead Free=Yes, Manufacturer Part Number=533980471, Number of Contacts=4, Number of Rows=1, Octopart=https://octopart.com/53398-0471-molex-655296, Pitch=1.25mm, RoHS=TRUE, Standoff Height=0.05mm, Temperature Range High=+105°C, Temperature Range Low=-40°C
L1 L2: library part CMP-06042-011776-1, "Shielded Wirewound Inductor 4.7uH 20% 1400mA 0.2Ω 1008 (2520)", Case Code (Imperial)=1008, Case Code (Metric)=2520, Current Rating=2A, DC Resistance (DCR)=200mR, Inductance=4.7uH, Max DC Current=1.4A, Max Operating Temperature=125°C, Min Operating Temperature=-40°C, Resistor Type=Wirewound, Test Frequency=1MHz, Tolerance=20%, Case/Package=1008, Core Material=Ferrite, Depth=2mm, Height - Seated (Max)=0.047inch, Length=0.098inch, Mount="Surface Mount", Packaging="Tape and Reel", Shielding=Shielded, Width=0.079inch
L3: "The LMH0397 is a 3G-SDI 75-Ω bidirectional I/O with integrated reclocker.", Manufacturer_Name="Texas Instruments", Mouser Part Number=595-LMH0397RTVR, Arrow Part Number=LMH0397RTVR, Arrow Price/Stock=https://www.arrow.com/en/products/lmh0397rtvr/texas-instruments?utm_currency=USD&region=nac, Datasheet Link=https://www.ti.com/lit/ds/symlink/lmh0397.pdf?HQS=dis-dk-null-digikeymode-dsf-pf-null-wwe&ts=1630762637746, Height=0.8mm, Manufacturer_Part_Number=LMH0397RTVR, Mouser Price/Stock=https://www.mouser.co.uk/ProductDetail/Texas-Instruments/LMH0397RTVR?qs=5aG0NVq1C4zpBN83bcpBMQ%3D%3D
M1: "SFP+, Connector, .8mm [.031in] Centerline, Power & Signal, Operating Temperature Range -55 – 85 °C [-67 – 185 °F], Data Rate (Max) 16Gb/sec", Manufacturer="TE Connectivity (TE", Author="Parsa Malekpor", License=Apache-2.0, Part Number=1888247-1
Q1 Q2 Q3 Q4 Q5 Q6: "MOSFET N-CH 50V 0.2A UMT3F", Continuous Drain Current=200mA, Drain to Source Breakdown Voltage=50V, Drain to Source Resistance=1.6Ω, Gate To Source Voltage=8V, Input Capacitace At Vds="26pF @ 10V", Manufacturer=Rohm, Max Forward Diode Voltage=1.2V, Max Junction Temp=+150°C, Package=UMT3F, Power Dissipation=150mW, Pulse Drain Current=800mA, Temperature="to +150°C", Automotive=No, Category=Trans, ComponentLink2Description=Datasheet, ComponentLink2URL=https://d1d2qsbl8m0m72.cloudfront.net/en/products/databook/datasheet/discrete/transistor/mosfet/ru1j002yn-e.pdf, Depletion Mode=False, Device Class L1="Discrete Semiconductors", Device Class L2=Transistors, Device Class L3=MOSFETs, Digikey Description="MOSFET N-CH 50V 0.2A UMT3F", Drain To Source Voltage=50V, Height=1.05mm, Lead Free=Yes, Manufacturer Part Number=RU1J002YNTCL, Mouser Description="MOSFET 0.9V Drive Nch MOSFET", Number Of Channels=1, Number Of N Channels=1, Octopart=https://octopart.com/ru1j002yntcl-rohm-47197697, RoHS=TRUE, Rthja Max=833°C/W, Standoff Height=0mm, Temperature Range High=+150°C, Threshold Vgs Max=0.8V, Threshold Vgs Min=0.3V, Turn Off Delay Time=17ns, Turn On Delay Time=5ns
R1 R3 R12 R13 R14 R15 R16 R19 R34 R35 R36 R37: library part CMP-2002-07353-1, Manufacturer="Yageo / Phycomp", Part Number=RC0402FR-070RL
R2 R18 R20 R21: library part CMP-2002-07456-1, Manufacturer="Yageo / Phycomp", Part Number=RC0402FR-071K2L
R4 R5 R6 R7 R8 R9 R11 R22 R43 R44: library part CMP-2002-07353-1, Manufacturer="Yageo / Phycomp"
  R4 R5 R6 R7 R8 R22 R43 R44: Part Number=RC0402FR-0710KL
  R9 R11: Part Number=RC0402FR-070RL
R10 R30: library part CMP-2002-07613-1, Manufacturer="Yageo / Phycomp", Part Number=RC0402FR-07330RL
R17: library part CMP-2002-07567-1, Manufacturer="Yageo / Phycomp", Part Number=RC0402FR-072K2L
R23 R24: Manufacturer="Yageo / Phycomp", Part Number=RC0402FR-076K98L
R25 R26 R27: library part CMP-2002-07798-1, Manufacturer="Yageo / Phycomp", Part Number=RC0402FR-0775RL
R29: library part CMP-2002-07711-1, Manufacturer="Yageo / Phycomp", Part Number=RC0402FR-074K22L
R31: library part CMP-2002-07119-1, Manufacturer="Yageo / Phycomp", Part Number=RC0402FR-076K98L
R32 R33: library part CMP-2002-07710-1, Manufacturer="Yageo / Phycomp", Part Number=RC0402FR-074K02L
SW1 SW2: library part CMP-03913-99472344-3, "Slide Switch, 0.3A, 5Vdc, Smd Rohs Compliant: Yes", Current Rating=300mA, Insulation Resistance=100MΩ, Manufacturer Lifecycle Status=ACTIVE, Max Operating Temperature=85°C, Min Operating Temperature=-40°C, Voltage Rating=5V, Contact Plating=Silver, Lifecycle Status=Production, Packaging="Tape and Reel", RoHS=Compliant, YEOL="1 = Estimated lifetime > 10 years"
U3 U4: library part CMP-0395-00479-2, "Single Output Fast Transient Response LDO, 1 A, Adjustable 1.2 to 20 V Output, 2.2 to 20 V Input, 6-pin SOT-223 (DCQ), -40 to 125 degC, Green (RoHS & no Sb/Br)", Manufacturer="Texas Instruments", ComponentLink1Description="Manufacturer URL", ComponentLink1URL=http://www.ti.com/, ComponentLink2Description=Datasheet, ComponentLink2URL=http://www.ti.com/general/docs/lit/getliterature.tsp?genericPartNumber=TPS73801&fileType=pdf, ComponentLink3Description="Package Specification", ComponentLink3URL=http://www.ti.com/litv/pdf/mpds098c, DatasheetVersion=SLVS915A, Eco-Plan="Green (RoHS & no Sb/Br)", Iout(Max)(A)=1, Iq(Typ)(mA)=1, Mounting Technology="Surface Mount", PackageDescription="6-Pin Plastic Small Outline, Body 3.5 x 6.5 mm, Pitch 1.27 mm", PackageReference=DCQ0006A, PackageVersion=4202109/D, PartNumber=TPS73801DCQR, SubFamily="Single Channel LDO", Vdo(Typ)(mV)=300, Vin(Max)(V)=20, Vin(Min)(V)=2.2, Vout Adj(Max)(V)=20, Vout Adj(Min)(V)=1.2

## Free pads (board coordinates)
  round 5 hole 3: 2(10,-20) 2(10,-3) 2(77,-29)

## Via types
v1: diameter 0.6, hole 0.3, Top Layer to Bottom Layer, tented both sides, 163 vias

## Nets (pads, with @x,y where several pads share a name; then routed paths per layer and width w, separated by ;. In a path a pad name is that pad's centre, name@x,y a point inside that pad or via, vN(x,y) a via of type N, cw(c..) or ccw(c..) an arc to the next point about the centre after c; other vN are vias at no path point)
+2V5: C26.1 C27.1 C28.1 C29.1 C30.1 C31.1 D9.2 IC1.3 IC1.6 L3.21 L3.30 R3.1 R12.1 R16.1 R23.1 R30.1 R37.1 R43.1 R44.1 SW1.L1 SW2.L1 | length 10.3
  Top Layer w0.152: R16.1@15.875,-7.263 15.875,-4.953 16.383,-4.445 v1(19.177,-4.445) ; v1(20.193,-4.445) 20.193,-3.81 20.447,-3.556
  Top Layer w0.203: R37.1@24.892,-9.283 v1(24.892,-8.763)
  Top Layer w0.457: v1(16.256,-17.399) R3.1@16.256,-16.879 ; v1(21.082,-27.686) 21.085,-27.683 21.085,-26.712 SW2.L1@21.088,-26.709 ; R12.1@21.106,-16.879 21.106,-17.804 21.209,-17.907 21.209,-18.284 21.205,-18.288 R43.1@21.203,-18.288
  other v1: 11.549,-27.635 12.208,-27.629 11.049,-25.019 11.049,-25.019 11.938,-25.019 28.829,-18.83 29.552,-18.83 30.276,-18.83 28.829,-18.115 29.552,-18.115 30.276,-18.115 21.106,-17.399 28.829,-17.399 29.552,-17.399 30.276,-17.399 24.003,-12.02 25.146,-12.02 19.177,-8.382 19.177,-7.112 20.193,-5.326
+3V3: C1.1 C2.1 C32.1 D11.2 IC1.7 J3.3 L1.1 L2.1 R2.1 R4.1 R5.1 R6.1 R7.1 R8.1 R18.1 R20.1 R21.1 R22.1 R24.1 | length 96
  Top Layer w0.3: J3.3@4.413,-26.294 4.416,-26.291 7.099,-26.291 v1(7.112,-26.304) ; IC1.7@8.001,-23.794 v1(8.001,-22.733) ; v1(42.136,-12.944) 46.482,-12.944 47.117,-13.579 48.27,-13.579 ; R24.1@43.155,-18.388 43.155,-17.434 ; 43.205,-18.013 43.205,-17.931 ; 48.387,-13.462 48.27,-13.579 ; R20.1@67.818,-29.845 R18.1@67.818,-28.702 R21.1@67.818,-27.559 67.815,-27.556 66.678,-27.556 R22.1@66.675,-27.553 61.716,-27.553 60.96,-26.797 60.96,-14.087 60.452,-13.579 48.27,-13.579
  Bottom Layer w0.3: C32.1@7.479,-22.733 v1(8.001,-22.733) 8.001,-25.415 v1(7.112,-26.304) 7.112,-28.575 7.493,-28.956 10.947,-28.956 11.709,-29.718 16.317,-29.718 17.188,-28.847 20.211,-28.847 21.082,-29.718 25.781,-29.718 26.416,-29.083 26.416,-20.361 26.797,-19.98 38.578,-19.98 38.873,-19.685 38.873,-19.055 v1(38.878,-19.05)
  other v1: 3.843,-26.304 41.021,-13.589 42.136,-13.579 40.993,-12.944
+5V: C16.1 C17.1 C18.1 C20.1 C23.1 D1.1 J1.1 R17.1 U3.1 U3.5 U4.1 U4.5 | length 1.3
  Top Layer w0.254: U4.5@40.53,-24.376 U4.5@40.536,-24.37 ; v1@40.536,-23.12 v1(40.542,-23.114)
  Top Layer w0.305: U4.5@40.536,-24.37 v1@40.536,-23.12
  other v1: 36.195,-24.511 47.371,-24.257 48.26,-24.257 34.561,-23.622 35.378,-23.622 36.195,-23.622 45.593,-23.368 46.482,-23.368 47.371,-23.368 48.26,-23.368 29.464,-22.987 36.195,-22.733
ADDR0: L3.11 R14.1 | length 1.7
  Top Layer w0.203: R14.1@18.796,-16.129 18.796,-16.104 19.439,-15.461 L3.11@19.439,-14.679
ADDR1: L3.28 R1.1 | length 1.4
  Top Layer w0.305: L3.28@20.439,-9.779 R1.1@20.439,-8.382
ENABLE: L3.32 R16.2 | length 4
  Top Layer w0.152: R16.2@15.875,-8.013 15.875,-9.072 16.383,-9.58 18.365,-9.58 18.439,-9.654 L3.32@18.439,-9.779
EQ_CD_SEL: L3.5 R19.1 | length 1.5
  Top Layer w0.203: R19.1@16.371,-12.7 16.764,-12.7 16.985,-12.479 L3.5@17.739,-12.479